# Altium PCB RPIShield.PcbDoc
Units mil, origin at the board's own origin, x right, y up, seen from the top; angles counter-clockwise.
Board outline 2558.74 x 2204.72 mil, 2 copper layers (Top Layer, Bottom Layer), stack 61.2 mil thick; 1 components, 28 nets, 44 pads, 0 vias.
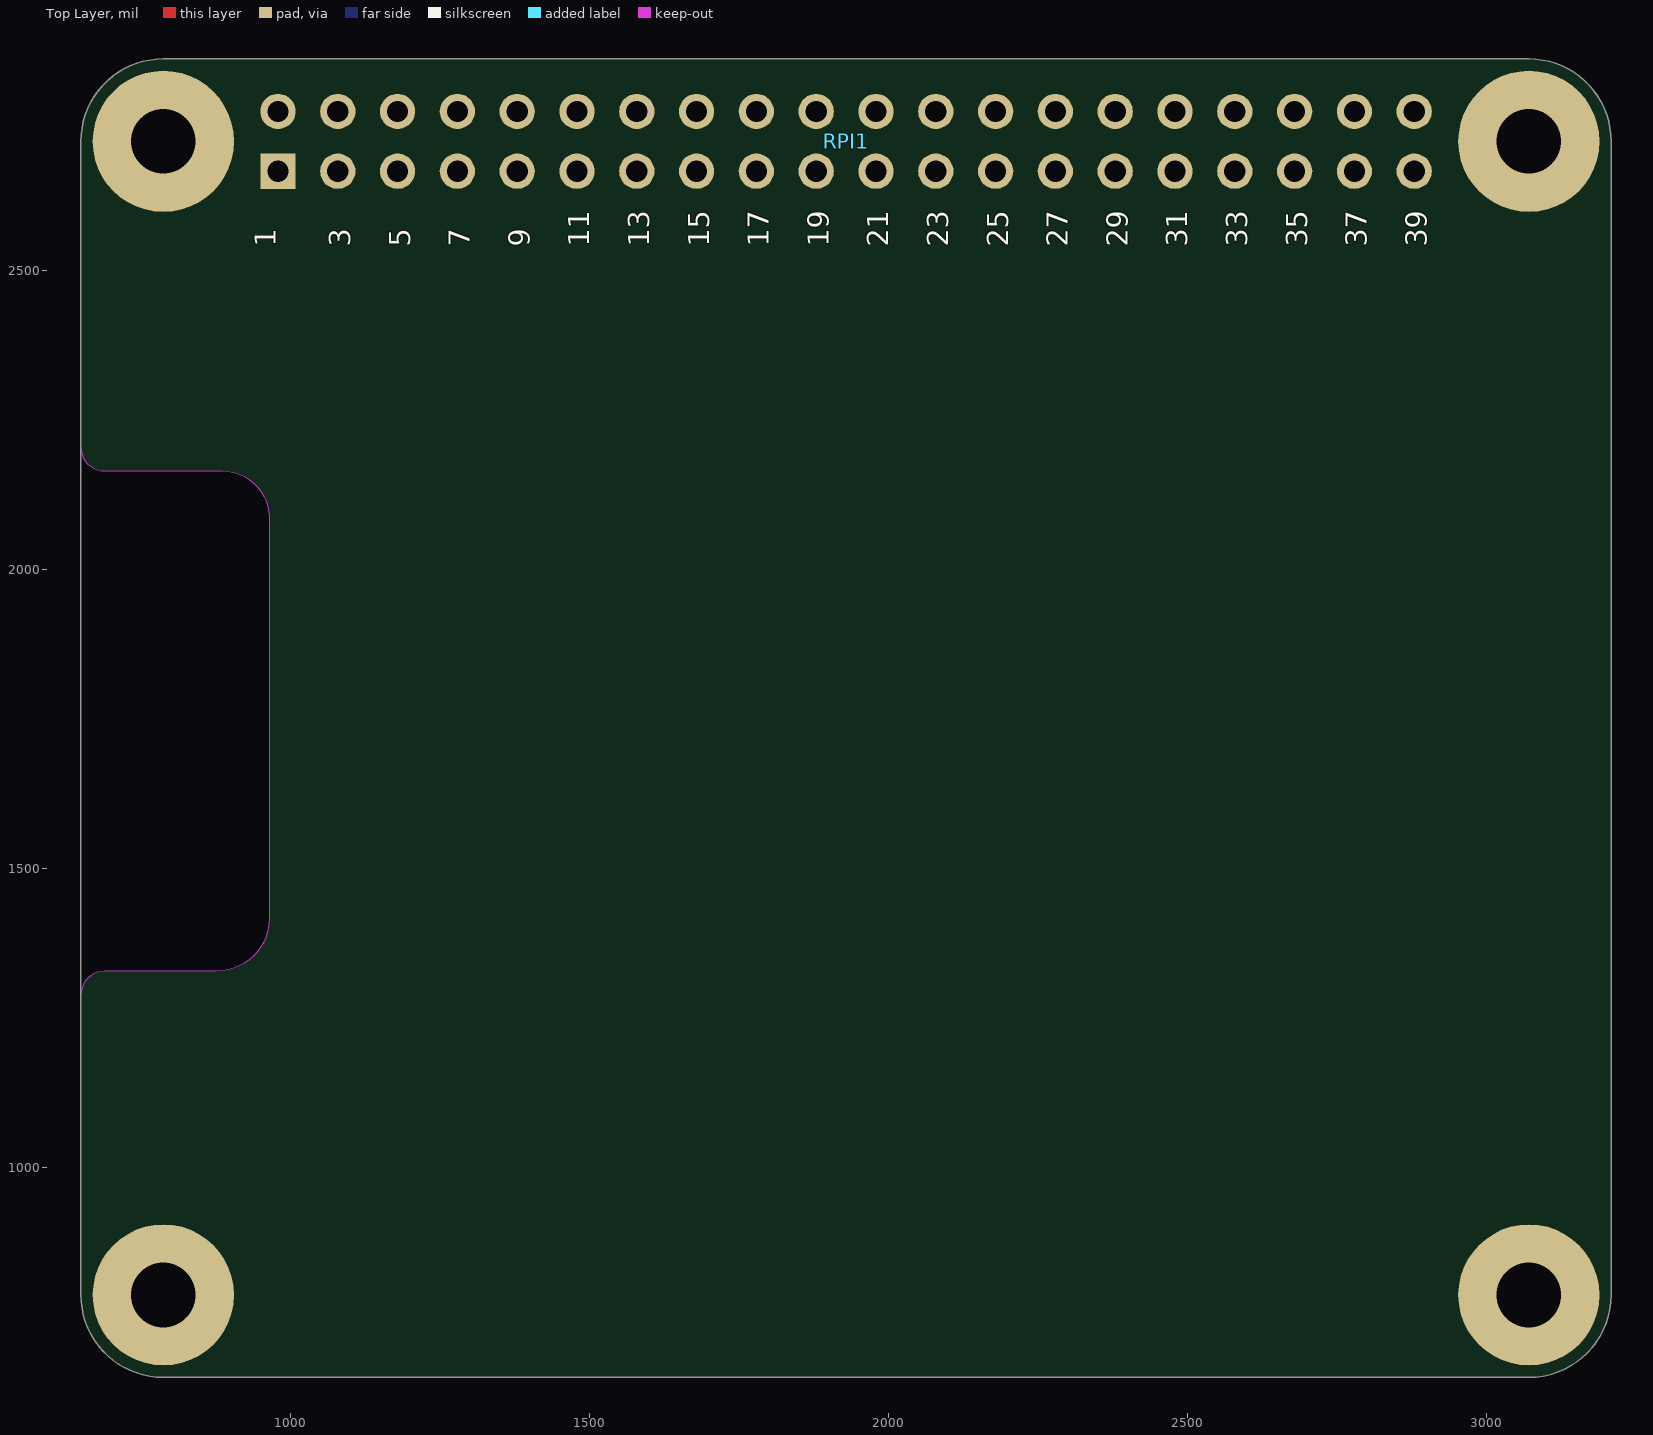
[diagram p0: Top Layer view]
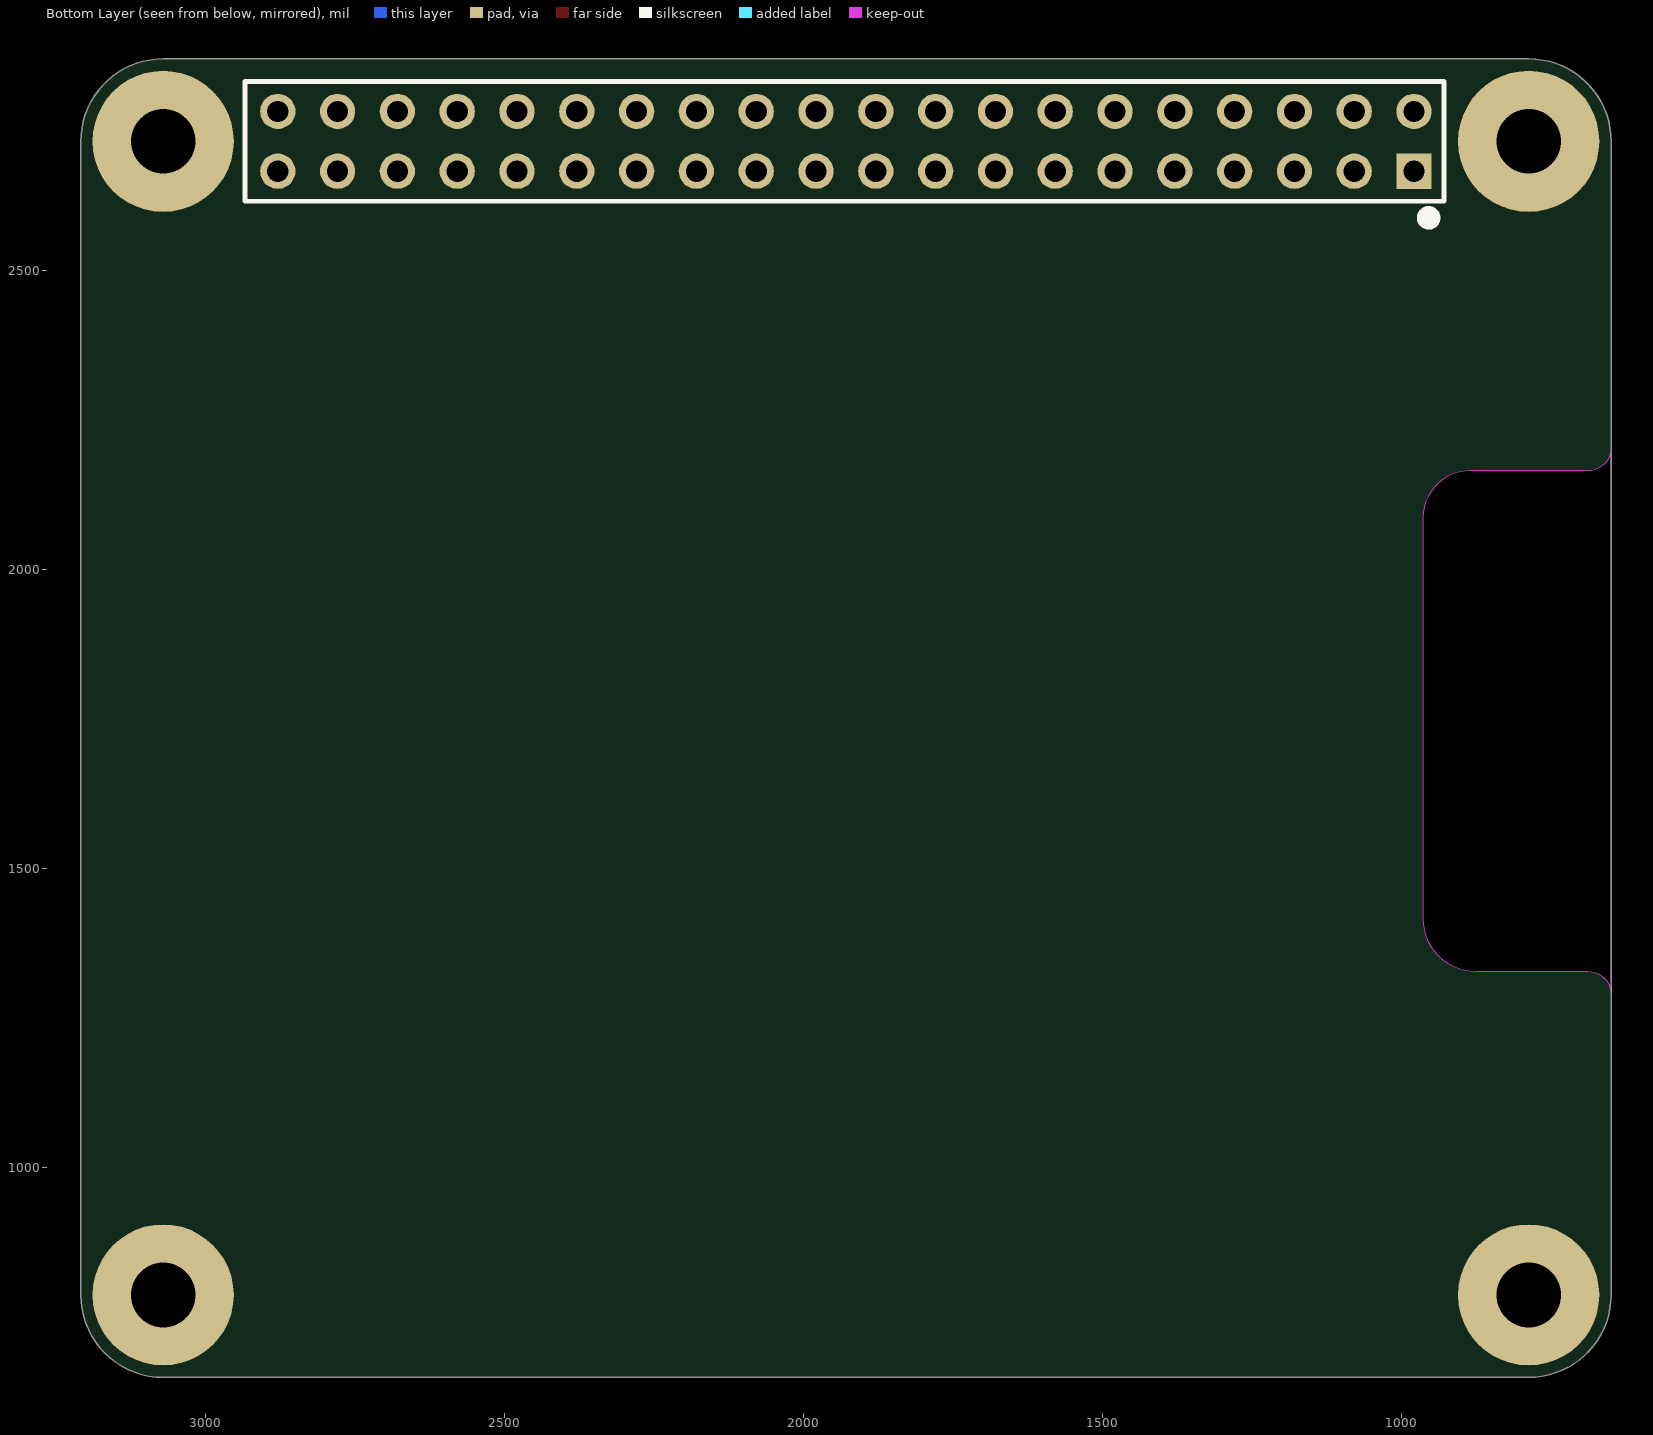
[diagram p1: Bottom Layer view, seen from below]

## Layer stack, top to bottom
Top Solder: solder mask 0.8, Solder Resist, Dk 3.5
Top Layer: signal copper 2.1
Dielectric 1: dielectric 57, FR-4, Dk 4.6
Bottom Layer: signal copper 2.1
Bottom Solder: solder mask 0.8, Solder Resist, Dk 3.5

## Board outline
649.61,787.4 ccw(c787.4,787.4) 787.4,649.61 3070.87,649.61 ccw(c3070.71,787.24) 3208.35,787.4 3208.35,2716.54 ccw(c3070.71,2716.69) 3070.87,2854.33 787.4,2854.33 ccw(c787.4,2716.54) 649.61,2716.54
cut-out: 649.61,1289.37 649.61,2204.72 ccw(c688.98,2204.72) 688.98,2165.35 885.83,2165.35 cw(c885.83,2086.61) 964.57,2086.61 964.57,1417.32 cw(c875.99,1417.32) 875.98,1328.74 688.98,1328.74 ccw(c688.97,1289.37)

## Design rules (kind name [scope] priority, off if disabled: settings)
Clearance [All] p1: gap=10 ignorepadtopadclearanceinfootprint=FALSE except(0: Arc-Hole Track-Hole SMDPad-Hole THPad-Hole Via-Hole Fill-Hole Poly-Hole Region-Hole Text-Hole)
PolygonConnect [All] p1: connectstyle=Relief reliefconductorwidth=10 reliefentries=4 polygonreliefangle="90 Angle" airgapwidth=10
RoutingVias [All] p1: holewidth=28 width=50 viastyle="Through Hole" minholewidth=28 minwidth=50 maxholewidth=28 maxwidth=50
SolderMaskExpansion [All] p1: expansion=4 istentingtop=FALSE
Width [All] p1: maxlimit=10 minlimit=10 preferedwidth=10
30 further rules are at their usual default settings.

## Components (designator, comment, footprint, x,y, rotation, side; value= is the part's Value field where it differs from the comment)
RPI1 "RPI GPIO Connector" RPI 1929.13,2716.54 r180 top

## Footprints (in the part's own frame and the unit in brackets; to place one, negate y for a bottom-side part, rotate by r counter-clockwise, add the part's x,y. Pads: shape width x height; smd on the part's side, far side on the other; paste and mask are expansions set on the pad)
RPI [mm]
  rect 1.5x1.5 hole 0.9: 1(24.13,1.27)
  round 1.5 hole 0.9: 2(24.13,-1.27) 3(21.59,1.27) 4(21.59,-1.27) 5(19.05,1.27) 6(19.05,-1.27) 7(16.51,1.27) 8(16.51,-1.27) 9(13.97,1.27) 10(13.97,-1.27) 11(11.43,1.27) 12(11.43,-1.27) 13(8.89,1.27) 14(8.89,-1.27) 15(6.35,1.27) 16(6.35,-1.27) 17(3.81,1.27) 18(3.81,-1.27) 19(1.27,1.27) 20(1.27,-1.27) 21(-1.27,1.27) 22(-1.27,-1.27) 23(-3.81,1.27) 24(-3.81,-1.27) 25(-6.35,1.27) 26(-6.35,-1.27) 27(-8.89,1.27) 28(-8.89,-1.27) 29(-11.43,1.27) 30(-11.43,-1.27) 31(-13.97,1.27) 32(-13.97,-1.27) 33(-16.51,1.27) 34(-16.51,-1.27) 35(-19.05,1.27) 36(-19.05,-1.27) 37(-21.59,1.27) 38(-21.59,-1.27) 39(-24.13,1.27) 40(-24.13,-1.27)
  body extent -25.52,-2.63 25.53,2.38, height 8.5

## Part data
RPI1: library part "rpi connector", "GPIO Header for Raspberry Pi A+/B+/Pi 2/Pi 3 - 2x20", Manufacturer="SparkFun Electronics", Manufacturer Part Number=PRT-14017, Supplier Part Number 1=1568-1462-ND, Accessory Type=Connector, Category="Development Boards, Kits, Programmers", ComponentLink1Description=https://cdn.sparkfun.com/datasheets/Dev/RaspberryPi/12313.pdf, ComponentLink1URL=https://cdn.sparkfun.com/datasheets/Dev/RaspberryPi/12313.pdf, For Use With/Related Products="Raspberry Pi", Nils Minor=author, nilsminor@web.de=mail, Part Status=Active, Pricing 1="1=1.84 (EUR)", RoHS="RoHS Compliant", Stock 1=150, Supplier 1=Digi-Key

## Free pads (board coordinates)
  round 236.22 hole 108.27: ""(787.4,787.4) ""(787.4,2716.54) ""(3070.87,787.4) ""(3070.87,2716.54)

## Nets (pads, with @x,y where several pads share a name; then routed paths per layer and width w, separated by ;. In a path a pad name is that pad's centre, name@x,y a point inside that pad or via, vN(x,y) a via of type N, cw(c..) or ccw(c..) an arc to the next point about the centre after c; other vN are vias at no path point)
+3V3: 
+5V: 
GND: 
NetRPI1_3: 
NetRPI1_5: 
NetRPI1_7: 
NetRPI1_8: 
NetRPI1_10: 
NetRPI1_11: 
NetRPI1_13: 
NetRPI1_15: 
NetRPI1_16: 
NetRPI1_18: 
NetRPI1_19: 
NetRPI1_21: 
NetRPI1_22: 
NetRPI1_23: 
NetRPI1_24: 
NetRPI1_26: 
NetRPI1_29: 
NetRPI1_31: 
NetRPI1_32: 
NetRPI1_33: 
NetRPI1_35: 
NetRPI1_36: 
NetRPI1_37: 
NetRPI1_38: 
NetRPI1_40: 
pads on no net: RPI1.1 RPI1.2 RPI1.3 RPI1.4 RPI1.5 RPI1.6 RPI1.7 RPI1.8 RPI1.9 RPI1.10 RPI1.11 RPI1.12 RPI1.13 RPI1.14 RPI1.15 RPI1.16 RPI1.17 RPI1.18 RPI1.19 RPI1.20 RPI1.21 RPI1.22 RPI1.23 RPI1.24 RPI1.25 RPI1.26 RPI1.27 RPI1.28 RPI1.29 RPI1.30 RPI1.31 RPI1.32 RPI1.33 RPI1.34 RPI1.35 RPI1.36 RPI1.37 RPI1.38 RPI1.39 RPI1.40

## Silkscreen, mask and mechanical layers (free items; w line width, h text height)
Top Overlay:
  text "1" at 975,2540.16 h35 r90
  text "3" at 1100,2540.16 h35 r90
  text "5" at 1200,2540.16 h35 r90
  text "7" at 1300,2540.16 h35 r90
  text "9" at 1400,2540.16 h35 r90
  text "11" at 1500,2540.16 h35 r90
  text "13" at 1600,2540.16 h35 r90
  text "15" at 1700,2540.16 h35 r90
  text "17" at 1800,2540.16 h35 r90
  text "19" at 1900,2540.16 h35 r90
  text "21" at 2000,2540.16 h35 r90
  text "23" at 2100,2540.16 h35 r90
  text "25" at 2200,2540.16 h35 r90
  text "27" at 2300,2540.16 h35 r90
  text "29" at 2400,2540.16 h35 r90
  text "31" at 2500,2540.16 h35 r90
  text "33" at 2600,2540.16 h35 r90
  text "35" at 2700,2540.16 h35 r90
  text "37" at 2800,2540.16 h35 r90
  text "39" at 2900,2540.16 h35 r90
Bottom Overlay:
  circle w19.68: c954.72,2588.58 r9.84
M2: Outline:
  the board outline again, w10